# Altium PCB ElectroporationPCB.PcbDoc
Units mm, origin at the board's own origin, x right, y up, seen from the top; angles counter-clockwise.
Board outline 152.4 x 101.6 mm, 2 copper layers (Top Layer, Bottom Layer); 64 components, 53 nets, 242 pads, 0 vias.
Unrouted connection lines stored in the file: 158.
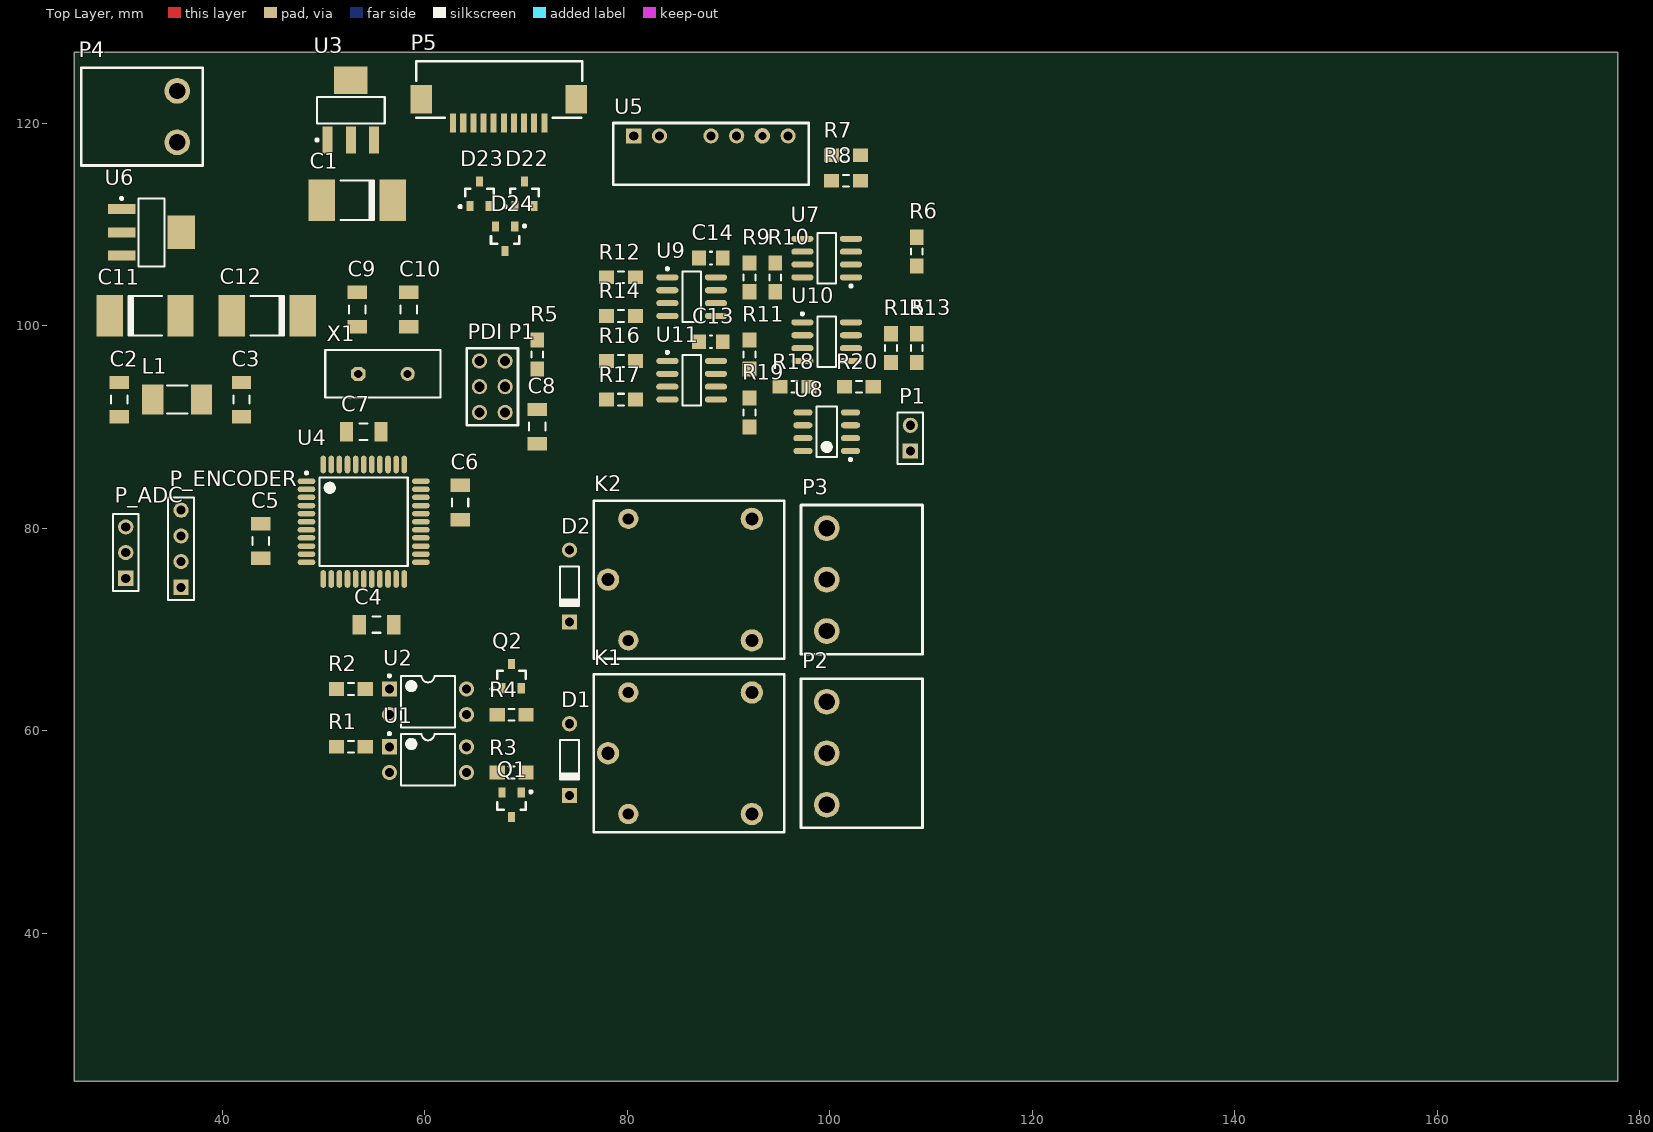
[diagram p0: Top Layer view]
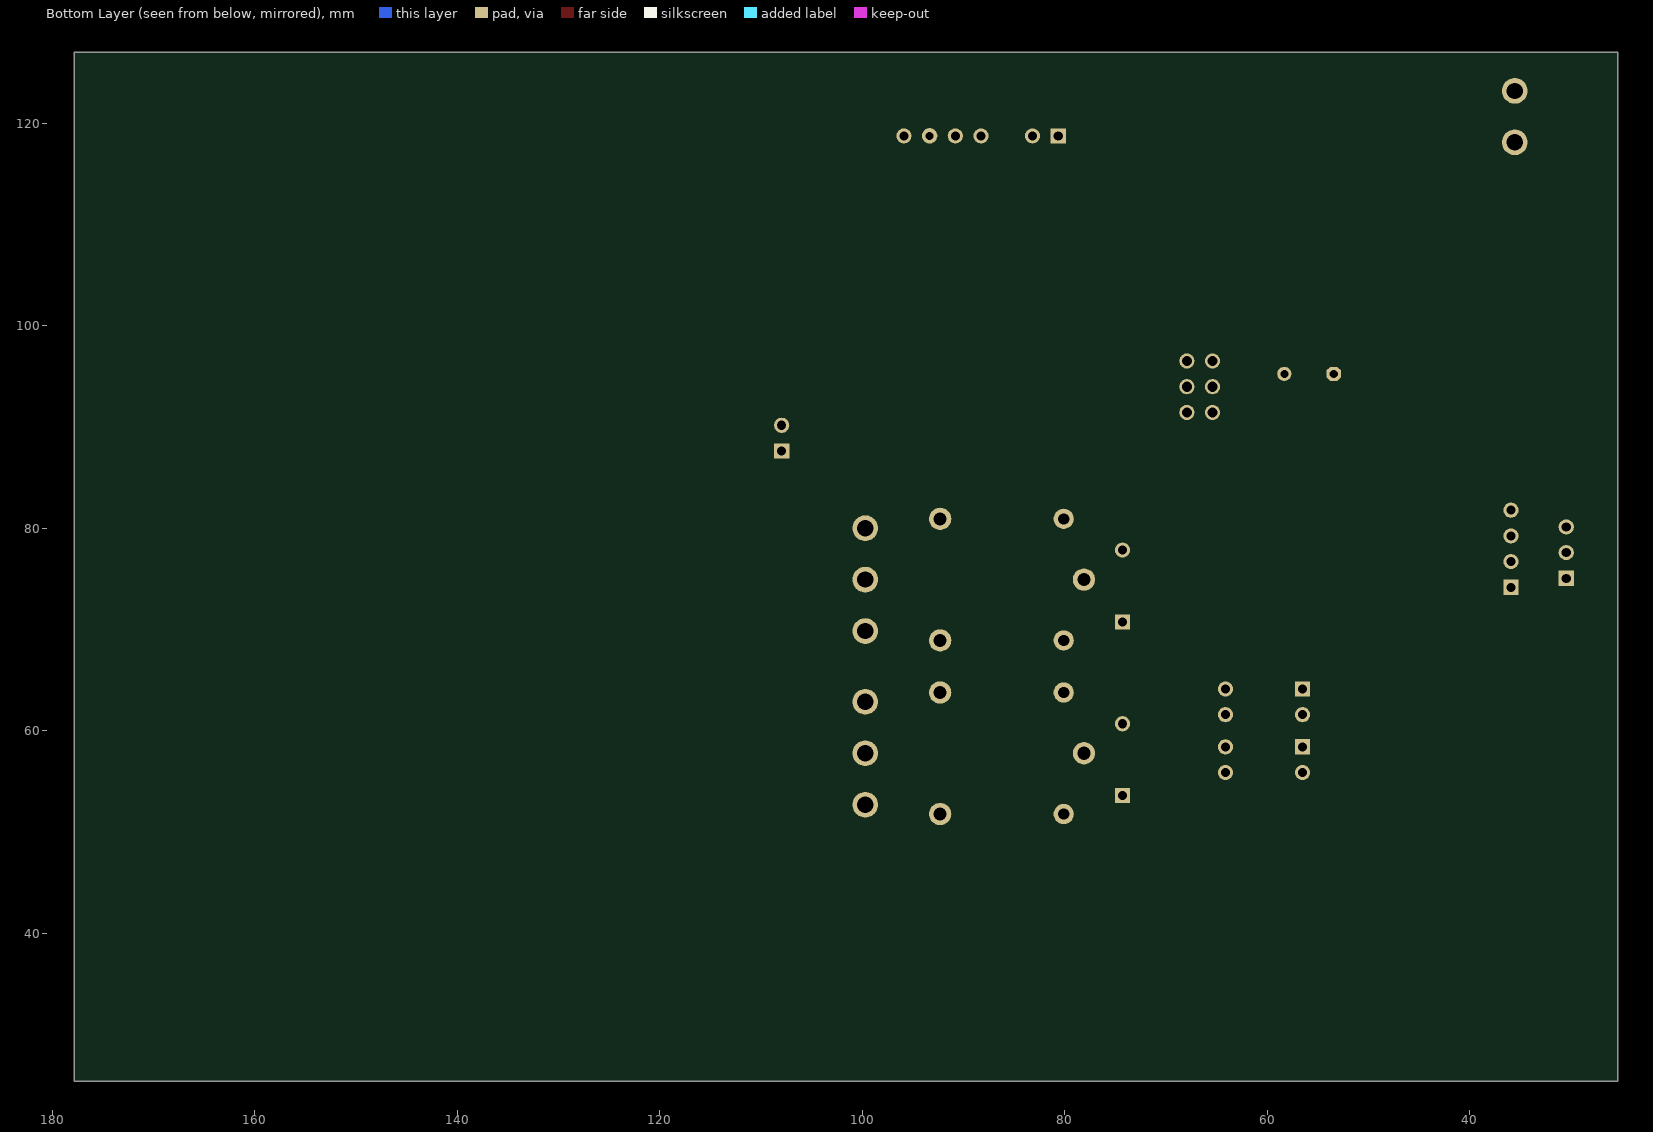
[diagram p1: Bottom Layer view, seen from below]

## Layer stack, top to bottom
Top Solder: solder mask 0.0102, Solder Resist, Dk 3.5
Top Layer: signal copper 0.0356
Dielectric 1: dielectric 0.32, FR-4, Dk 4.8
Bottom Layer: signal copper 0.0356
Bottom Solder: solder mask 0.0102, Solder Resist, Dk 3.5

## Board outline
25.4,25.4 177.8,25.4 177.8,127 25.4,127

## Design rules (kind name [scope] priority, off if disabled: settings)
Clearance [All] p1: gap=0.1
PolygonConnect [All] p1: connectstyle=Relief reliefconductorwidth=0.254 reliefentries=4 polygonreliefangle="90 Angle" airgapwidth=0.254
RoomDefinition Xmega [InComponentClass('Xmega')] p1: confinementstyle=ConfineIn formatcopy=TRUE lockcomponents=FALSE outline 25.4,67.945 76.835,67.945 76.835,127 25.4,127
RoomDefinition main [InComponentClass('main')] p2: confinementstyle=ConfineIn formatcopy=TRUE lockcomponents=FALSE outline 49.53,46.99 110.49,46.99 110.49,83.82 49.53,83.82
RoomDefinition Designator [InComponentClass('Designator')] p3: confinementstyle=ConfineIn formatcopy=TRUE lockcomponents=FALSE outline 76.835,83.82 110.49,83.82 110.49,127 76.835,127
RoutingVias [All] p1: holewidth=0.711 width=1.27 viastyle="Through Hole" minholewidth=0.711 minwidth=1.27 maxholewidth=0.711 maxwidth=1.27
SolderMaskExpansion [All] p1: expansion=0.102
Width [All] p1: maxlimit=2 minlimit=0.254 preferedwidth=0.254
29 further rules are at their usual default settings.

## Classes and differential pairs
component class Xmega: C1 C2 C3 C4 C5 C6 C7 C8 C9 C10 C11 C12 D22 D23 D24 L1 P4 P5 "PDI P1" R5 U3 U4 U5 U6 X1
component class main: D1 D2 K1 K2 P1 P2 P3 P_ADC P_ENCODER Q1 Q2 R1 R2 R3 R4 U1 U2
component class Designator: C13 C14 R6 R7 R8 R9 R10 R11 R12 R13 R14 R15 R16 R17 R18 R19 R20 U7 U8 U9 U10 U11

## Components (designator, comment, footprint, x,y, rotation, side; value= is the part's Value field where it differs from the comment)
C1 "Cap Pol SMD" CAPC7343 53.34,112.395 r180 top
C2 "Cap chip" CAPC3216 29.845,92.71 r270 top
C3 "Cap chip" CAPC3216 41.91,92.71 r270 top
C4 "Cap chip" CAPC3216 55.245,70.485 r0 top
C5 "Cap chip" CAPC3216 43.815,78.74 r270 top
C6 "Cap chip" CAPC3216 63.5,82.55 r90 top
C7 "Cap chip" CAPC3216 53.975,89.535 r180 top
C8 "Cap chip" CAPC3216 71.12,90.043 r90 top
C9 "Cap chip" CAPC3216 53.34,101.6 r270 top
C10 "Cap chip" CAPC3216 58.42,101.6 r270 top
C11 "Cap Pol SMD" CAPC7343 32.385,100.965 r0 top
C12 "Cap Pol SMD" CAPC7343 44.45,100.965 r180 top
C13 "ChipCap" CAP0805 88.265,98.425 r0 top
C14 "ChipCap" CAP0805 88.265,106.68 r0 top
D1 "Diode 1N4148" DO-35 74.295,57.15 r270 top
D2 "Diode 1N4148" DO-35 74.295,74.295 r270 top
D22 "Diode Schottky" SOT23 69.85,113.03 r90 top
D23 "Diode Schottky" SOT23 65.405,113.03 r90 top
D24 "TVS" SOT23 67.945,108.585 r270 top
K1 "Relay 1 pole" G5LA 78.105,57.785 r0 top
K2 "Relay 1 pole" G5LA 78.105,74.93 r0 top
L1 "Inductance" CM45 35.56,92.71 r180 top
P1 "Header 2" HDR1X2 107.95,87.63 r90 top
P2 "Terminal Block 3x5.08mm" "Socket 3x5.08" 99.695,57.785 r180 top
P3 "Terminal Block 3x5.08mm" "Socket 3x5.08" 99.695,74.93 r180 top
P4 "Terminal Block 2x5.08mm" "Socket 2x5.08" 35.56,120.65 r0 top
P5 "FPC_Socket" "Molex FPC/FFC 10pin" 67.31,122.555 r180 top
P_ADC "Header 3" HDR1X3 30.48,75.057 r90 top
P_ENCODER "Header 4" HDR1X4 35.941,74.168 r90 top
"PDI P1" "PDI Header 3x2" "Header 3x2" 65.405,96.52 r0 top
Q1 "BC847" SOT23 68.58,52.705 r270 top
Q2 "BC847" SOT23 68.58,65.405 r90 top
R1 "ChipRes" RES0805 52.705,58.42 r0 top
R2 "ChipRes" RES0805 52.705,64.135 r0 top
R3 "ChipRes" RES0805 68.58,55.88 r0 top
R4 "ChipRes" RES0805 68.58,61.595 r0 top
R5 "ChipRes" RES0805 71.12,97.155 r90 top
R6 "ChipRes" RES0805 108.585,107.315 r90 top
R7 "ChipRes" RES0805 101.6,116.84 r0 top
R8 "ChipRes" RES0805 101.6,114.3 r180 top
R9 "ChipRes" RES0805 92.075,104.775 r90 top
R10 "ChipRes" RES0805 94.615,104.775 r90 top
R11 "ChipRes" RES0805 92.075,97.155 r90 top
R12 "ChipRes" RES0805 79.375,104.775 r180 top
R13 "ChipRes" RES0805 108.585,97.79 r90 top
R14 "ChipRes" RES0805 79.375,100.965 r180 top
R15 "ChipRes" RES0805 106.045,97.79 r270 top
R16 "ChipRes" RES0805 79.375,96.52 r180 top
R17 "ChipRes" RES0805 79.375,92.71 r180 top
R18 "ChipRes" RES0805 96.52,93.98 r180 top
R19 "ChipRes" RES0805 92.075,91.44 r270 top
R20 "ChipRes" RES0805 102.87,93.98 r180 top
U1 "Optoisolator1" DIP-4 60.325,57.15 r0 top
U2 "Optoisolator1" DIP-4 60.325,62.865 r0 top
U3 "LM1117" SOT223-4M 52.705,121.285 r90 top
U4 "ATxmega16A4-AU" 44A_N 53.975,80.645 r0 top
U5 "AM1D-0505" SIP14 80.645,118.745 r90 top
U6 "LM1117" SOT223-4M 33.02,109.22 r0 top
U7 "TL431ACD" D008_N 99.695,106.68 r180 top
U8 "LM358AD" D008_L 99.695,89.535 r180 top
U9 "HCPL0631" SOIC8 86.36,102.87 r0 top
U10 "TLC6515CD" SOIC8 99.695,98.425 r0 top
U11 "HCPL0631" SOIC8 86.36,94.615 r0 top
X1 "XTAL" BCY-W2/E4.7 55.88,95.25 r0 top

## Footprints (in the part's own frame and the unit in brackets; to place one, negate y for a bottom-side part, rotate by r counter-clockwise, add the part's x,y. Pads: shape width x height; smd on the part's side, far side on the other; paste and mask are expansions set on the pad)
44A_N [mm] "Thin QFP, 44-Leads, Body 10x10mm, Pitch 0.8mm, IPC Medium Density"
  oval 1.75x0.55 smd: 1(-5.65,4) 2(-5.65,3.2) 3(-5.65,2.4) 4(-5.65,1.6) 5(-5.65,0.8) 6(-5.65,0) 7(-5.65,-0.8) 8(-5.65,-1.6) 9(-5.65,-2.4) 10(-5.65,-3.2) 11(-5.65,-4) 23(5.65,-4) 24(5.65,-3.2) 25(5.65,-2.4) 26(5.65,-1.6) 27(5.65,-0.8) 28(5.65,0) 29(5.65,0.8) 30(5.65,1.6) 31(5.65,2.4) 32(5.65,3.2) 33(5.65,4)
  oval 0.55x1.75 smd: 12(-4,-5.65) 13(-3.2,-5.65) 14(-2.4,-5.65) 15(-1.6,-5.65) 16(-0.8,-5.65) 17(0,-5.65) 18(0.8,-5.65) 19(1.6,-5.65) 20(2.4,-5.65) 21(3.2,-5.65) 22(4,-5.65) 34(4,5.65) 35(3.2,5.65) 36(2.4,5.65) 37(1.6,5.65) 38(0.8,5.65) 39(0,5.65) 40(-0.8,5.65) 41(-1.6,5.65) 42(-2.4,5.65) 43(-3.2,5.65) 44(-4,5.65)
  silkscreen extent -5.77,-4.35 4.35,4.95, body extent -5,-5 5,5, height 1.2
BCY-W2/E4.7 [mm] "Quartz Crystal, Thru-Hole; 2 Leads; Body 11.35 x 4.65 x 13.46 mm (LxWxH max)"
  oct 1.4x1.4 hole 0.8: 1(-2.44,0)
  round 1.4 hole 0.8: 2(2.44,0)
  silkscreen extent -5.7,-2.35 5.7,2.35, body extent -5.67,-2.32 5.68,2.33, height 3.6
CAP0805 [mm]
  rect 1.35x1.45 smd: 1(-1.175,0) 2(1.175,0)
  silkscreen extent -0.1,-0.63 0.1,0.63, body extent -1.4,-0.65 1.4,0.65, height 0.55
CAPC3216 [mm] "Chip Capacitor, Body 3.2x1.6mm, IPC Medium Density"
  rect 1.3x1.9 smd: 1(-1.7,0) 2(1.7,0)
  silkscreen extent -0.4,-0.8 0.4,0.8, body extent -1.6,-0.81 1.6,0.81, height 1.02
CAPC7343 [mm] "Chip Capacitor, Body 7.3x4.3mm, IPC Medium Density"
  rect 2.6x4.1 smd: 1(-3.5,0) 2(3.5,0)
  silkscreen extent -1.65,-1.95 1.65,1.95, body extent -3.8,-2.3 3.8,2.3, height 3.1
CM45 [mm]
  rect 2.1x2.99 smd: 1(-2.405,0) 2(2.405,0)
  silkscreen extent -1,-1.39 1,1.4, body extent -3,-1.5 3,1.5, height 0.55
D008_L [mm] "SOIC, 8-Leads, Body 4.9x3.9mm, Pitch 1.27mm, IPC High Density"
  oval 1.9x0.6 smd: 1(-2.35,1.905) 2(-2.35,0.635) 3(-2.35,-0.635) 4(-2.35,-1.905) 5(2.35,-1.905) 6(2.35,-0.635) 7(2.35,0.635) 8(2.35,1.905)
  silkscreen extent -2.48,-2.5 1,2.88, body extent -2,-2.5 2,2.5, height 1.75
D008_N [mm] "SOIC, 8-Leads, Body 4.9x3.9mm, Pitch 1.27mm, IPC Medium Density"
  oval 2.2x0.6 smd: 1(-2.4,1.905) 2(-2.4,0.635) 3(-2.4,-0.635) 4(-2.4,-1.905) 5(2.4,-1.905) 6(2.4,-0.635) 7(2.4,0.635) 8(2.4,1.905)
  silkscreen extent -2.53,-2.5 0.9,2.88, body extent -2,-2.5 2,2.5, height 1.75
DIP-4 [mm] "DIP; 4 Leads; Row Spacing 7.62 mm; Pitch 2.54 mm"
  rect 1.5x1.5 hole 0.9: 1(-3.81,1.27)
  round 1.5 hole 0.9: 2(-3.81,-1.27) 3(3.81,-1.27) 4(3.81,1.27)
  silkscreen extent -3.93,-2.55 2.65,2.69, body extent -3.94,-2.29 3.94,2.3, height 4.3
DO-35 [mm] "Diode, Axial; Body 3.8 x 1.9 mm (LxDia. max), Lead Dia. 0.53 mm (max)"
  round 1.5 hole 0.9: 1(-3.55,0)
  rect 1.5x1.5 hole 0.9: 2(3.55,0)
  silkscreen extent -1.95,-0.95 2.05,0.95
G5LA [mm] "Cubic, Single-pole 10A Power Relay"
  round 2.2 hole 1.3: 1(0,0) 3(14.2,6) 4(14.2,-6)
  round 2 hole 1.1: 2(2,6) 5(2,-6)
  silkscreen extent -1.4,-7.8 17.4,7.8, body extent -1.59,-7.95 17.91,7.95, height 15
HDR1X2 [mm] "Connector; Header; 2 Position"
  rect 1.5x1.5 hole 0.9: 1(0,0)
  round 1.5 hole 0.9: 2(2.54,0)
  silkscreen extent -1.27,-1.27 3.81,1.27
HDR1X3 [mm] "Connector; Header; 3 Position"
  rect 1.5x1.5 hole 0.9: 1(0,0)
  round 1.5 hole 0.9: 2(2.54,0) 3(5.08,0)
  silkscreen extent -1.27,-1.27 6.35,1.27
HDR1X4 [mm] "Connector; Header; 4 Position"
  rect 1.5x1.5 hole 0.9: 1(0,0)
  round 1.5 hole 0.9: 2(2.54,0) 3(5.08,0) 4(7.62,0)
  silkscreen extent -1.27,-1.27 8.89,1.27
"Header 3x2" [mm]
  round 1.5 hole 1: 1(0,0) 2(2.54,0) 3(0,-2.54) 4(2.54,-2.54) 5(0,-5.08) 6(2.54,-5.08)
  silkscreen extent -1.27,-6.35 3.81,1.27, body extent -1.23,-6.35 3.77,1.27, height 8.61
"Molex FPC/FFC 10pin" [mm] "Molex FPC/FFC 10pin Non-ZIF Connector 10pin"
  rect 0.6x1.9 smd: 1(-4.5,2.54) 2(-3.5,2.54) 3(-2.5,2.54) 4(-1.5,2.54) 5(-0.5,2.54) 6(0.5,2.54) 7(1.5,2.54) 8(2.5,2.54) 9(3.5,2.54) 10(4.5,2.54)
  rect 2.1x2.8 smd: 11(-7.65,0.19) 12(7.65,0.19)
  silkscreen extent -8.25,-3.56 8.13,2.03, body extent -8.15,-3.53 8.15,3.27, height 3.1
RES0805 [mm] "Chip Resistor, 2-Leads, Body 3.40x1.30mm, IPC Medium Density"
  rect 1.5x1.35 smd: 1(-1.425,0) 2(1.425,0)
  silkscreen extent -0.3,-0.58 0.3,0.58, body extent -1.7,-0.65 1.7,0.65, height 0.55
SIP14 [mm]
  rect 1.5x1.5 hole 0.9: 1(0,0)
  round 1.5 hole 0.9: 2(0,-2.54) 4(0,-7.62) 5(0,-10.16) 7(0,-15.24)
  round 1.524 hole 0.762: 6(0,-12.7)
  silkscreen extent -4.83,-17.27 1.27,2.03
"Socket 2x5.08" [mm]
  round 2.54 hole 1.6: 1(0,2.54) 2(0,-2.54)
  silkscreen extent -9.46,-4.83 2.54,4.83, body extent -9.97,-5.08 2.03,5.08, height 8.5
"Socket 3x5.08" [mm]
  round 2.54 hole 1.6: 1(0,5.08) 2(0,0) 3(0,-5.08)
  silkscreen extent -9.46,-7.37 2.54,7.37, body extent -9.97,-7.62 2.03,7.62, height 8.5
SOIC8 [mm] "SOIC, 8-Leads, Body 4,90x3,90mm, Pitch 1,27mm, IPC Medium Density"
  oval 2.2x0.6 smd: 1(-2.4,1.905) 2(-2.4,0.635) 3(-2.4,-0.635) 4(-2.4,-1.905) 5(2.4,-1.905) 6(2.4,-0.635) 7(2.4,0.635) 8(2.4,1.905)
  silkscreen extent -2.52,-2.5 0.9,2.88, body extent -3,-2.54 3,2.46, height 3.33
SOT23 [mm]
  rect 1x0.7 smd: 1(-1.2,0.95) 2(-1.2,-0.95) 3(1.2,0)
  silkscreen extent -1.4,-1.4 0.51,2.03, body extent -1.25,-1.5 1.25,1.5, height 1.09
SOT223-4M [mm] "SOT223, 4-Leads, Body 6.5x3.5mm, Pitch 2.3mm, Lead Span 7mm, IPC Low Density"
  rect 2.7x1 smd: 1(-2.95,2.3) 2(-2.95,0) 3(-2.95,-2.3)
  rect 2.7x3.3 smd: 4(2.95,0)
  silkscreen extent -3.07,-3.35 1.3,3.47, body extent -3.5,-3.25 3.5,3.25, height 1.7

## Part data
C1 C11 C12: library part "Cap Pol Chip", "Polarized Capacitor (Radial)"
C2 C3 C4 C5 C6 C7 C8 C9 C10: "Chip Capacitor"
C13 C14: "Capacitor"
D1 D2: "High Conductance Fast Diode"
D22 D23: library part "Schottky Diode", "2-Diode Schottky"
D24: library part "TVS Diode", "Dual bidirectional voltage supresor"
K1 K2: library part "Relay G5LE", "Relay G5LE 10A Single Pole"
L1: library part ChipInductance
P1: "Header, 2-Pin"
P2 P3: library part Socket_3x5.08_RA_2Wall, "Terminal Block Socket Right Angle 3x5.08mm 2-Wall"
P4: library part Socket_2x5.08_RA_2Wall, "Terminal Block Socket Right Angle 2x5.08mm 2 Wall"
P_ADC: "Header, 3-Pin"
P_ENCODER: "Header, 4-Pin"
"PDI P1": "PDI Interface connector"
Q1 Q2: "NPN transistor"
R1 R2 R3 R4 R5 R6 R7 R8 R9 R10 R11 R12 R13 R14 R15 R16 R17 R18 R19 R20: "Chip resistor"
U1 U2: "4-Pin Phototransistor Optocoupler"
U3 U6: "Power Mgt Voltage Regulator"
U4: "8/16-bit AVR XMEGA A4 Microcontroller, 1.6-3.6V, 16KB + 4KB Flash, 1KB EEPROM, 2KB SRAM, 44-pin TQFP, Industrial Grade (-40°C to 85°C), Pb-Free"
U5: library part AM1D-0512, "DC-DC 5-12V convertor"
U7: "Adjustable Precision Shunt Regulator"
U8: "Dual Operational Amplifier"
U9 U11: "2-channel opto-coupler"
U10: library part TLC6515, "10-bit analog to digiyal converter"
X1: library part "Crystall oscillator", "Quartz crystall oscillator"

## Nets (pads, with @x,y where several pads share a name; then routed paths per layer and width w, separated by ;. In a path a pad name is that pad's centre, name@x,y a point inside that pad or via, vN(x,y) a via of type N, cw(c..) or ccw(c..) an arc to the next point about the centre after c; other vN are vias at no path point)
ADC0: P_ADC.1 U4.42
ADC1: P_ADC.2 U4.25
AREF: U4.4
AVCC3V3: C3.1 C7.2 L1.1 U4.39
DAC_CS: R16.2 U4.1
DAC_MOSI: R12.2 U4.2
DAC_SCK: R14.2 U4.3
GND: "PDI P1.6" C1.2 C2.2 C3.2 C4.1 C5.1 C6.1 C7.1 C8.1 C9.1 C10.1 D22.1 D23.1 D24.3 P4.2 P5.8 P5.9 P5.10 P_ADC.3 P_ENCODER.4 U1.2 U2.2 U3.1 U4.8 U4.18 U4.30 U4.38 U5.2 U9.2 U9.3 U11.2 U11.3
IGND: C11.2 C12.2 C13.1 C14.1 P1.2 Q1.2 Q2.2 R7.1 R15.2 R18.1 R19.1 R20.1 U5.5 U6.1 U7.2 U7.3 U7.6 U7.7 U8.4 U9.5 U10.5 U11.5
IVCC5V: C12.1 C13.2 C14.2 R9.2 R10.2 R11.2 U1.4 U2.4 U6.2 U6.4 U9.8 U10.8 U11.8
IVCC12V: C11.1 D1.2 D2.2 K1.5 K2.5 R6.2 U5.6 U5.7 U6.3 U8.8
MISO: U4.44
NetC9_2: C9.2 U4.37 X1.1
NetC10_2: C10.2 U4.36 X1.2
NetD1_1: D1.1 K1.2 Q1.3
NetD2_1: D2.1 K2.2 Q2.3
NetK1_1: K1.1 P2.1
NetK1_3: K1.3 P2.3
NetK1_4: K1.4 P2.2
NetK2_1: K2.1 P3.1
NetK2_3: K2.3 P3.3
NetK2_4: K2.4 P3.2
NetP1_1: P1.1 U8.1 U8.2
NetQ1_1: Q1.1 R3.2
NetQ2_1: Q2.1 R4.2
NetR1_2: R1.2 U1.1
NetR2_2: R2.2 U2.1
NetR3_1: R3.1 U1.3
NetR4_1: R4.1 U2.3
NetR6_1: R6.1 R8.2 U7.1
NetR9_1: R9.1 U9.7 U10.1
NetR10_1: R10.1 U9.6 U10.2
NetR11_1: R11.1 U10.3 U11.7
NetR12_1: R12.1 U9.1
NetR13_1: R13.1 U8.3
NetR13_2: R13.2 R15.1 U10.7
NetR14_1: R14.1 U9.4
NetR16_1: R16.1 U11.1
NetR17_1: R17.1 U11.4
NetR18_2: R18.2 U8.7
NetR19_2: R19.2 U8.6
NetR20_2: R20.2 U8.5
PDI_CLK: "PDI P1.5" C8.2 R5.1 U4.35
PDI_DATA: "PDI P1.1" U4.34
QUAD_A: P_ENCODER.2 U4.10
QUAD_B: P_ENCODER.3 U4.11
REF0.25V: R7.2 R8.1 U7.8 U10.6
RELAY1: R1.1 U4.40
RELAY2: R2.1 U4.41
USART_RX: D23.3 D24.2 P5.6 U4.32
USART_TX: D22.3 D24.1 P5.5 U4.33
VCC3V3: "PDI P1.2" C1.1 C2.1 C4.2 C5.2 C6.2 L1.2 R5.2 U3.2 U3.4 U4.9 U4.19 U4.31
VCC5V: D22.2 D23.2 P4.1 P5.1 P5.2 P5.3 P_ENCODER.1 U3.3 U5.1
pads on no net: "PDI P1.3" "PDI P1.4" P5.4 P5.7 P5.11 P5.12 R17.2 U4.5 U4.6 U4.7 U4.12 U4.13 U4.14 U4.15 U4.16 U4.17 U4.20 U4.21 U4.22 U4.23 U4.24 U4.26 U4.27 U4.28 U4.29 U4.43 U5.4 U7.4 U7.5 U10.4 U11.6